# Altium PCB MBP Universal Upgrade.PcbDoc
Units mm, origin at the board's own origin, x right, y up, seen from the top; angles counter-clockwise.
Board outline 16.9 x 10.5 mm, 2 copper layers (F.Cu, B.Cu); 2 components, 19 nets, 53 pads, 24 vias.
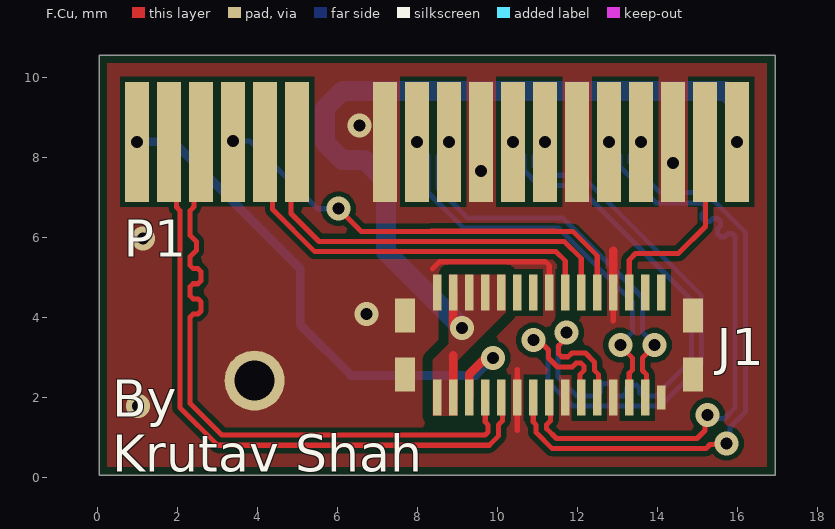
[diagram p0: F.Cu view]
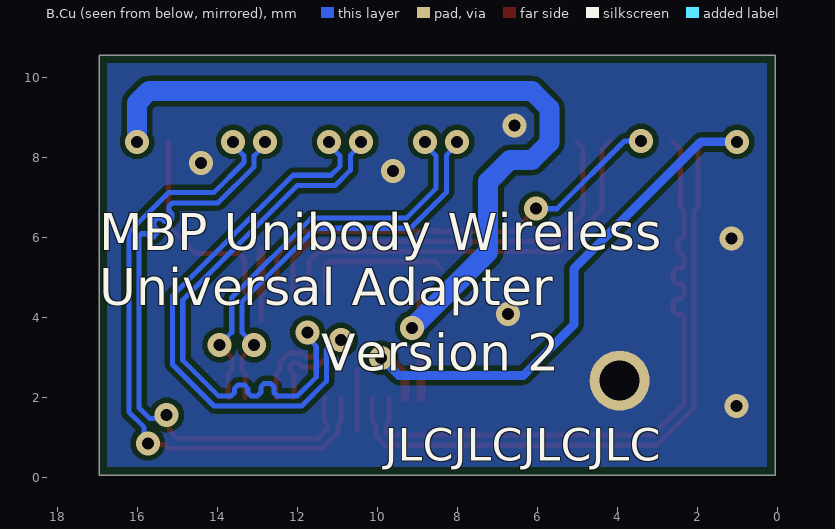
[diagram p1: B.Cu view, seen from below]

## Layer stack, top to bottom
F.Mask: solder mask 0.0102, Solder Resist, Dk 3.5
F.Cu: signal copper 0.0356
Dielectric 1: dielectric 0.32, FR-4, Dk 4.8
B.Cu: signal copper 0.0356
B.Mask: solder mask 0.0102, Solder Resist, Dk 3.5

## Board outline
0.05,0.05 0.05,10.55 16.95,10.55 16.95,0.05

## Design rules (kind name [scope] priority, off if disabled: settings)
BoardOutlineClearance [All] p1: gap=0.2 ignorepadtopadclearanceinfootprint=FALSE except(0: Arc-SplitContinuation Track-SplitContinuation SMDPad-SplitContinuation THPad-SplitContinuation Via-SplitContinuation Fill-SplitContinuation Poly-SplitContinuation Region-SplitContinuation Text-SplitContinuation)
Clearance [All] p1: gap=0.254 ignorepadtopadclearanceinfootprint=FALSE except(0: THPad-Hole Via-Hole Text-Hole; 0.127: Arc-Arc Arc-Track Arc-SMDPad Arc-Fill Arc-Poly Arc-Region Track-Track Track-SMDPad Track-Fill Track-Poly Track-Region SMDPad-SMDPad SMDPad-Fill SMDPad-Poly SMDPad-Region Via-Fill Via-Poly Via-Region)
DiffPairsRouting [All] p1: maxlimit=0.127 minlimit=0.127 mostfreqgap=0.127 toplayer_minwidth=0.127 toplayer_maxwidth=0.127 toplayer_prefwidth=0.127 bottomlayer_minwidth=0.127 bottomlayer_maxwidth=0.127 bottomlayer_prefwidth=0.127 maxuncoupledlength=12.7
HoleSize "Hole Size (Default)" [All] p1: absolutevalues=TRUE maxlimit=10 minlimit=0 maxpercent=80.000 minpercent=20.000
MinimumSolderMaskSliver [All] p1: minsoldermaskwidth=0
PolygonConnect PolygonConnect_3 [All vs IsNamedPolygon('GND_L01_P003') Or IsNamedPolygon('PP3V3_WLAN_L01_P002') Or IsNamedPolygon('GND_L02_P005')] p1: connectstyle=Direct reliefconductorwidth=0.254 reliefentries=4 polygonreliefangle="90 Angle" airgapwidth=0.254
PolygonConnect PolygonConnect_2 [All vs IsNamedPolygon('PP3V3_WLAN_L01_P002')] p2: connectstyle=Direct reliefconductorwidth=0.254 reliefentries=4 polygonreliefangle="90 Angle" airgapwidth=0.254
PolygonConnect PolygonConnect_1 [All vs IsNamedPolygon('GND_L01_P002')] p3: connectstyle=Direct reliefconductorwidth=0.254 reliefentries=4 polygonreliefangle="90 Angle" airgapwidth=0.254
PolygonConnect [All vs IsNamedPolygon('F.Cu-GND') Or IsNamedPolygon('B.Cu-GND')] p4: connectstyle=Direct reliefconductorwidth=0.254 reliefentries=4 polygonreliefangle="90 Angle" airgapwidth=0.254
PolygonConnect Polygon_F.Cu-GND_ConnectDirect [IsNamedPolygon('F.Cu-GND') vs IsVia] p5: connectstyle=Direct reliefconductorwidth=0.254 reliefentries=4 polygonreliefangle="90 Angle" airgapwidth=0.254
PolygonConnect Polygon_F.Cu-GND_ConnectRelief45 [IsNamedPolygon('F.Cu-GND') vs (IsThruPin or IsSMTPin) and (PadShape_AllLayers = 'Round')] p6: connectstyle=Relief reliefconductorwidth=0.2 reliefentries=4 polygonreliefangle="45 Angle" airgapwidth=0.2
PolygonConnect Polygon_F.Cu-GND_ConnectRelief90 [IsNamedPolygon('F.Cu-GND') vs (IsThruPin or IsSMTPin) and (PadShape_AllLayers <> 'Round')] p7: connectstyle=Relief reliefconductorwidth=0.2 reliefentries=4 polygonreliefangle="90 Angle" airgapwidth=0.2
PolygonConnect Polygon_B.Cu-GND_ConnectDirect [IsNamedPolygon('B.Cu-GND') vs IsVia] p8: connectstyle=Direct reliefconductorwidth=0.254 reliefentries=4 polygonreliefangle="90 Angle" airgapwidth=0.254
PolygonConnect Polygon_B.Cu-GND_ConnectRelief45 [IsNamedPolygon('B.Cu-GND') vs (IsThruPin or IsSMTPin) and (PadShape_AllLayers = 'Round')] p9: connectstyle=Relief reliefconductorwidth=0.2 reliefentries=4 polygonreliefangle="45 Angle" airgapwidth=0.2
PolygonConnect Polygon_B.Cu-GND_ConnectRelief90 [IsNamedPolygon('B.Cu-GND') vs (IsThruPin or IsSMTPin) and (PadShape_AllLayers <> 'Round')] p10: connectstyle=Relief reliefconductorwidth=0.2 reliefentries=4 polygonreliefangle="90 Angle" airgapwidth=0.2
RoutingVias [All] p1: holewidth=0.3 width=0.6 viastyle="Through Hole" minholewidth=0.3 minwidth=0.6 maxholewidth=0.3 maxwidth=0.6
SilkToSilkClearance [All] p1: silktosilkclearance=0
SilkToSolderMaskClearance [IsPad] p1: minsilkscreentomaskgap=0 clearancetoexposedcopper=TRUE
SolderMaskExpansion [All] p1: expansion=0.102 istentingtop=FALSE
Width [All] p1: maxlimit=10 minlimit=0.127 preferedwidth=0.25 minimp=50.000000 maximp=50.000000 favimp=50.000000
25 further rules are at their usual default settings.

## Classes and differential pairs
differential pair USB_BT: +USB_BT_P -USB_BT_N
differential pair PCIE_CLK100M_AP: +PCIE_CLK100M_AP_P -PCIE_CLK100M_AP_N
differential pair PCIE_AP_R2D: +PCIE_AP_R2D_P -PCIE_AP_R2D_N
differential pair PCIE_AP_D2R: +PCIE_AP_D2R_P -PCIE_AP_D2R_N

## Components (designator, comment, footprint, x,y, rotation, side; value= is the part's Value field where it differs from the comment)
J1 "Molex 501745-0301" 5017450301 11.303,3.048 r0 top
P1 "Edge Connector" MBPEdgeConnector 1,8.382 r0 top

## Footprints (in the part's own frame and the unit in brackets; to place one, negate y for a bottom-side part, rotate by r counter-clockwise, add the part's x,y. Pads: shape width x height; smd on the part's side, far side on the other; paste and mask are expansions set on the pad)
5017450301 [mm]
  rect 0.22x0.6 smd mask+0: 1(2.8,-1.061)
  rect 0.22x0.9 smd mask+0: 2(2.8,1.569) 3(2.4,-1.061) 4(2.4,1.569) 5(2,-1.061) 6(2,1.569) 7(1.6,-1.061) 8(1.6,1.569) 9(1.2,-1.061) 10(1.2,1.569) 11(0.8,-1.061) 12(0.8,1.569) 13(0.4,-1.061) 14(0.4,1.569) 15(0,-1.061) 16(0,1.569) 17(-0.4,-1.061) 18(-0.4,1.569) 19(-0.8,-1.061) 20(-0.8,1.569) 21(-1.2,-1.061) 22(-1.2,1.569) 23(-1.6,-1.061) 24(-1.6,1.569) 25(-2,-1.061) 26(-2,1.569) 27(-2.4,-1.061) 28(-2.4,1.569) 29(-2.8,-1.061) 30(-2.8,1.569)
  rect 0.5x0.85 smd mask+0: 31(3.6,-0.486) 32(3.6,0.994) 33(-3.6,0.994) 34(-3.6,-0.486)
MBPEdgeConnector [mm]
  rect 0.6x3 smd paste-3 mask+0: 1(15,0) 2(14.2,0) 3(13.4,0) 4(12.6,0) 5(11.8,0) 6(11,0) 7(10.2,0) 8(9.4,0) 9(8.6,0) 10(7.8,0) 11(7,0) 12(6.2,0) 13(4,0) 14(3.2,0) 15(2.4,0) 16(1.6,0) 17(0.8,0) 18(0,0)

## Part data
J1: library part 501745-0301
P1: library part AdapterPCIEContacts

## Free pads (board coordinates)
  round 1.5 hole 1: 2(3.937,2.413)

## Via types
v1: diameter 0.6, hole 0.3, F.Cu to B.Cu, tented both sides, 24 vias

## Nets (pads, with @x,y where several pads share a name; then routed paths per layer and width w, separated by ;. In a path a pad name is that pad's centre, name@x,y a point inside that pad or via, vN(x,y) a via of type N, cw(c..) or ccw(c..) an arc to the next point about the centre after c; other vN are vias at no path point)
AP_CLKREQ_Q_L: J1.10 P1.15 | length 11.2
  F.Cu w0.127: v1(6.034,6.71) 6.598,6.145 8.345,6.145 8.346,6.147 11.46,6.147 11.461,6.145 11.889,6.145 12.503,5.531 J1.10
  B.Cu w0.127: v1(3.4,8.401) 3.818,8.401 5.509,6.71 v1(6.034,6.71)
AP_PCIE_WAKE_L: J1.12 P1.13 | length 10.4
  F.Cu w0.127: P1.13 4.85,8.232 4.85,6.589 5.548,5.891 8.45,5.891 8.451,5.893 11.355,5.893 11.356,5.891 11.68,5.891 12.103,5.469 J1.12
AP_RESET_CONN_L: J1.14 P1.14 | length 10.4
  F.Cu w0.127: P1.14 4.383,8.199 4.383,6.697 5.442,5.637 8.555,5.637 8.556,5.639 11.25,5.639 11.251,5.637 11.472,5.637 11.703,5.406 J1.14
GND: J1.1 J1.7 J1.8 J1.13 J1.16 J1.19 J1.30 J1.31 J1.32 J1.33 J1.34 P1.3 P1.6 P1.9 P1.12 pad.2 | length 7
  F.Cu w0.127: 8.382,5.207 8.558,5.383 8.66,5.383 8.661,5.385 11.212,5.385 11.303,5.293 J1.16 ; 10.503,1.162 J1.19 10.503,2.691 ; 12.903,3.907 J1.8
  F.Cu w0.22: J1.8 12.903,5.659
  other v1: 1.016,1.778 6.731,4.083 1.143,5.969 9.6,7.65 14.4,7.85 6.563,8.789
Net-(J1-Pad2): J1.2
Net-(J1-Pad4): J1.4
Net-(J1-Pad18): J1.18
Net-(J1-Pad20): J1.20
PCIE_AP_D2R_N: J1.5 P1.11 | length 10.3
  F.Cu w0.127: v1(13.081,3.302) 13.081,3.283 13.381,2.983 13.381,2.674 13.303,2.596 J1.5
  B.Cu w0.127: v1@8.007,8.382 8.007,8.309 8.27,8.046 8.27,7.117 9.166,6.221 11.543,6.221 13.381,4.383 13.381,3.621 13.081,3.321 v1(13.081,3.302)
  other v1: 8,8.382
PCIE_AP_D2R_P: J1.3 P1.10 | length 10.3
  F.Cu w0.127: J1.3 13.731,2.014 13.731,2.569 13.635,2.664 13.635,2.983 13.935,3.283 v1(13.935,3.302)
  B.Cu w0.127: v1@8.807,8.382 8.807,8.309 8.524,8.026 8.524,7.222 9.271,6.475 11.648,6.475 13.635,4.488 13.635,3.621 13.935,3.321 v1(13.935,3.302)
  other v1: 8.8,8.382
PCIE_AP_R2D_N: J1.17 P1.4 | length 15.6
  F.Cu w0.127: J1.17 10.903,1.378 10.976,1.305 10.976,1.114 11.378,0.711 15.22,0.711 15.323,0.814 15.705,0.814 v1(15.734,0.843)
  B.Cu w0.127: v1@13.607,8.382 13.607,8.316 13.327,8.036 13.327,7.866 14.081,7.112 15.218,7.112 16.206,6.124 16.206,1.626 15.825,1.245 15.825,0.934 v1(15.734,0.843)
  other v1: 13.6,8.382
PCIE_AP_R2D_P: J1.15 P1.5 | length 15.5
  F.Cu w0.127: J1.15 11.331,1.959 11.331,1.405 11.24,1.315 11.24,1.209 11.484,0.965 14.995,0.965 15.195,1.166 15.195,1.489 v1(15.26,1.553)
  B.Cu w0.127: v1@12.807,8.382 12.807,8.302 13.073,8.036 13.073,7.761 13.976,6.858 15.113,6.858 15.126,6.845 15.171,6.8 15.202,6.769 15.202,6.655 15.128,6.581 15.128,6.467 15.204,6.391 15.319,6.391 15.392,6.464 15.507,6.464 15.583,6.388 15.583,6.274 15.509,6.2 15.509,6.086 15.585,6.01 15.699,6.01 15.773,6.084 15.887,6.084 15.932,6.039 15.952,6.019 15.952,1.732 15.683,1.463 15.35,1.463 v1(15.26,1.553)
  other v1: 12.8,8.382
PCIE_CLK100M_AP_N: J1.11 P1.7 | length 16.3
  F.Cu w0.127: v1(10.905,3.428) 11.033,3.428 11.285,3.177 11.285,2.978 11.508,2.755 11.88,2.755 11.975,2.849 12.102,2.849 12.176,2.774 12.176,2.669 12.076,2.569 12.076,2.014 J1.11
  B.Cu w0.127: v1(10.905,3.428) 11.033,3.428 11.269,3.193 11.269,2.394 11.884,1.778 14.075,1.778 15.113,2.816 15.113,4.536 12.103,7.546 11.152,7.546 10.924,7.775 10.924,8.025 11.207,8.309 v1@11.207,8.382
  other v1: 11.2,8.382
PCIE_CLK100M_AP_P: J1.9 P1.8 | length 16.3
  F.Cu w0.127: v1(11.739,3.613) 11.739,3.485 11.539,3.285 11.539,3.083 11.613,3.009 11.775,3.009 11.869,3.103 12.207,3.103 12.43,2.879 12.43,2.669 12.531,2.569 12.531,2.014 J1.9
  B.Cu w0.127: v1@10.407,8.382 10.407,8.309 10.67,8.046 10.67,7.669 11.047,7.292 11.997,7.292 14.859,4.43 14.859,2.921 13.97,2.032 13.833,2.032 13.643,2.032 13.561,2.114 13.561,2.219 13.479,2.301 13.316,2.301 13.234,2.219 13.234,2.114 13.152,2.032 12.989,2.032 12.907,2.114 12.907,2.256 12.825,2.338 12.662,2.338 12.58,2.256 12.58,2.114 12.498,2.032 12.435,2.032 11.99,2.032 11.523,2.499 11.523,3.269 11.739,3.485 v1(11.739,3.613)
  other v1: 10.4,8.382
PP3V3_S3_BT_F: J1.25 P1.18 | length 13.5
  F.Cu w0.22: J1.25 9.303,2.572 9.715,2.984 v1(9.903,2.984)
  B.Cu w0.22: v1@1.207,8.382 1.905,8.382 5.08,5.207 5.08,3.81 6.35,2.54 9.459,2.54 v1(9.903,2.984)
  other v1: 1,8.382
PP3V3_WLAN: J1.22 J1.24 J1.26 J1.27 J1.28 J1.29 P1.1 | length 20.7
  F.Cu w0.22: J1.27 8.903,3.048 ; v1@8.903,3.823 J1.28
  B.Cu w0.5: v1(9.125,3.731) 7.223,5.633 7.223,7.388 6.684,7.927 6.128,7.927 5.692,8.364 5.692,9.215 6.128,9.652 15.707,9.652 16,9.359 v1(16,8.382)
USB_BT_N: J1.23 P1.16 | length 16.2
  F.Cu w0.127: P1.16 2.417,8.199 2.417,6.75 2.327,6.66 2.327,6.208 2.327,6.041 2.402,5.966 2.405,5.966 2.48,5.89 2.48,5.664 2.405,5.589 2.402,5.589 2.327,5.513 2.327,5.287 2.402,5.212 2.521,5.212 2.596,5.136 2.596,4.91 2.521,4.835 2.402,4.835 2.327,4.759 2.327,4.533 2.402,4.458 2.521,4.458 2.596,4.382 2.596,4.156 2.521,4.081 2.402,4.081 2.327,4.005 2.327,3.565 2.327,1.842 3.118,1.051 9.699,1.051 9.776,1.128 9.776,1.305 9.703,1.378 J1.23
USB_BT_P: J1.21 P1.17 | length 16.2
  F.Cu w0.127: P1.17 1.983,8.199 1.983,6.75 2.073,6.66 2.073,1.737 3.013,0.797 9.804,0.797 10.03,1.023 10.03,1.305 10.131,1.405 10.131,1.959 J1.21
WIFI_EVENT_L: J1.6 P1.2 | length 5.2
  F.Cu w0.127: J1.6 13.303,5.429 13.462,5.588 14.531,5.588 15.211,6.268 15.211,8.371 P1.2

## Polygon pours and split planes (outlines as drawn)
GND on F.Cu "GND_L01_P003" (solid, remove dead copper, pour order 3): 0,10.55 0,0 17,0 17,10.55
PP3V3_WLAN on F.Cu "PP3V3_WLAN_L01_P002" (solid, pour order 2): 8.392,1.536 8.392,2.931 8.792,3.331 8.792,5.065 10.215,5.065 10.214,4.127 9.011,2.924 9.011,1.536
GND on B.Cu "GND_L02_P005" (solid, pour order 5): 0,10.55 0,0 17,0 17,10.55

## Silkscreen, mask and mechanical layers (free items; w line width, h text height)
F.SilkS:
  text "By / Krutav Shah" at 0.381,0.131 h0.92
B.SilkS:
  text "MBP Unibody Wireless / Universal Adapter" at 16.946,4.3 h0.92
  text "Version 2" at 11.402,2.653 h0.92
  text "JLCJLCJLCJLC" at 9.803,0.407 h0.81
Margin:
  the board outline again, w0.1